# EAGLE board seeed_panel (EAGLE 9.0.1)
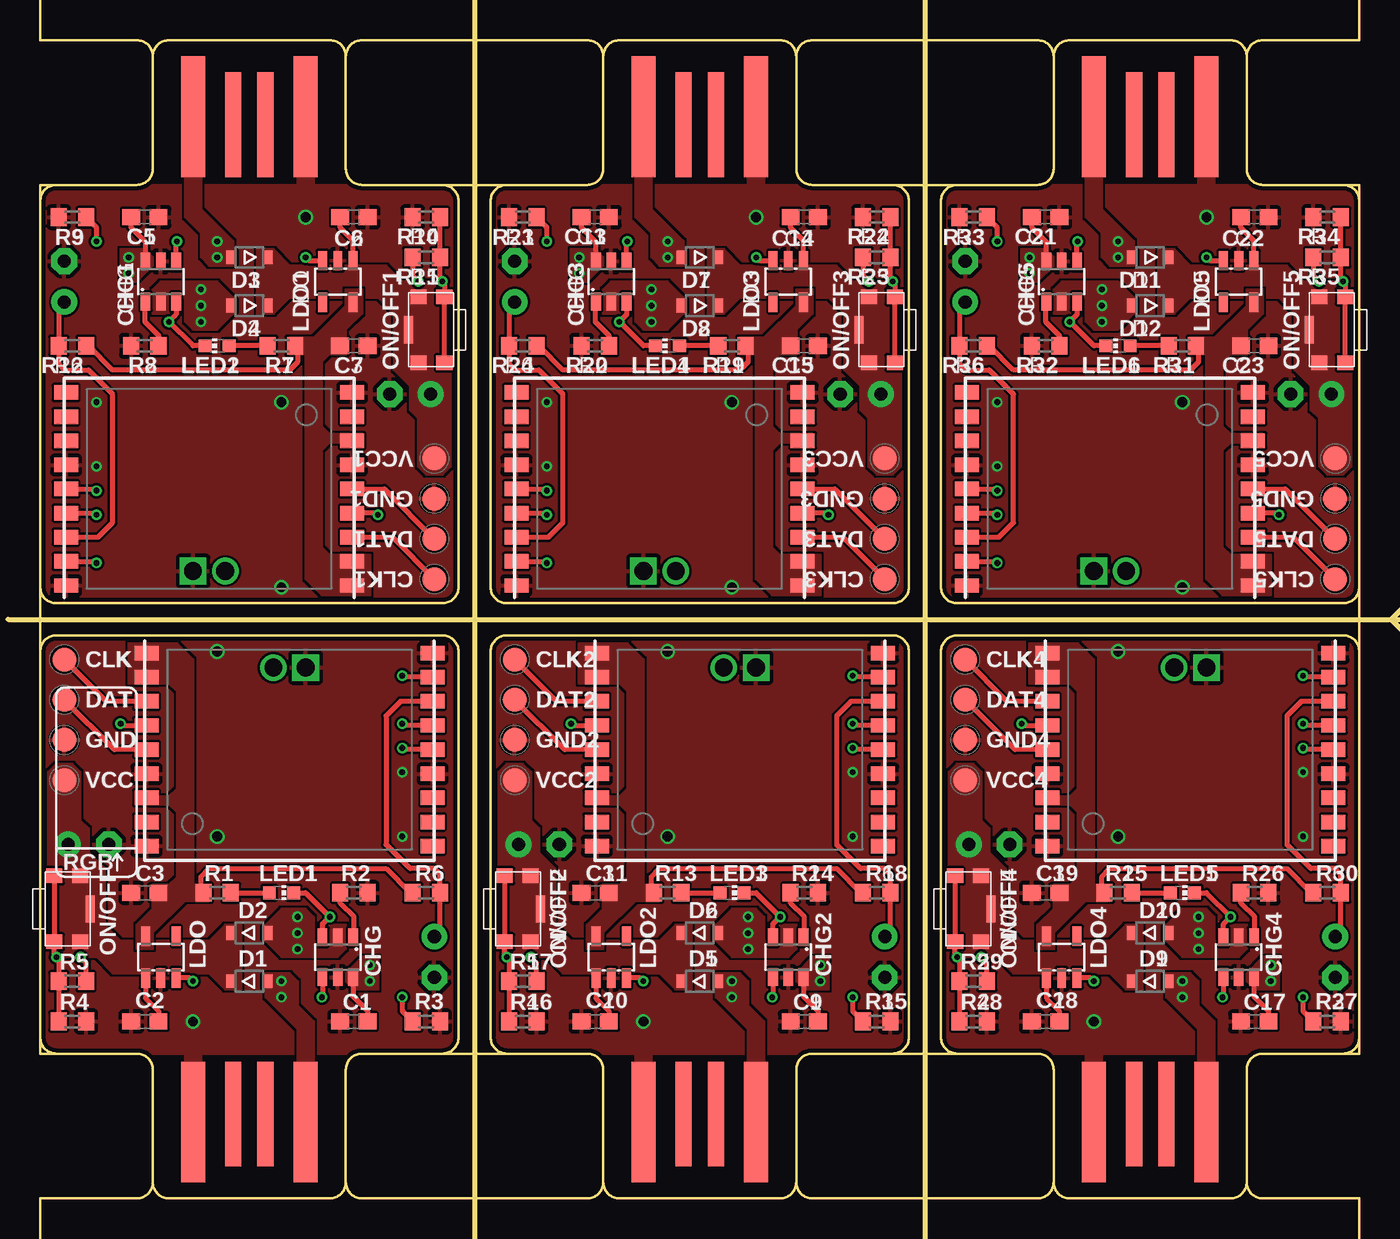
[diagram p0: board, top side]
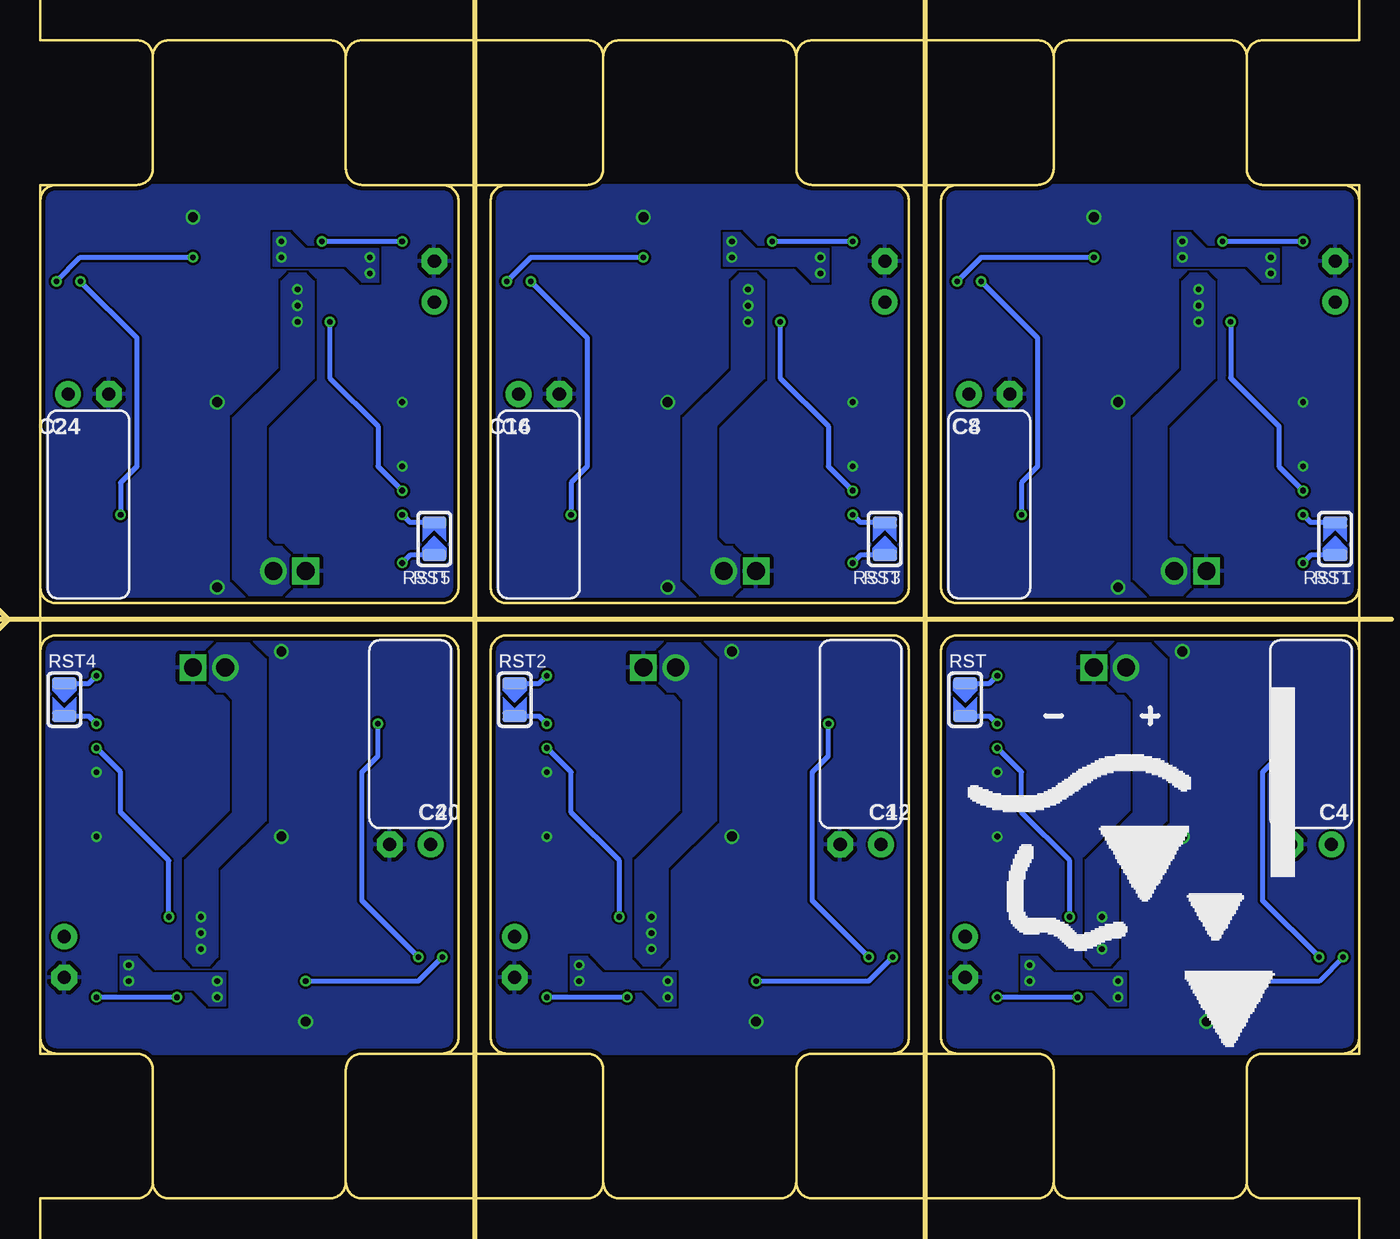
[diagram p1: board, bottom side, seen from below]

Size 82 x 72 mm. Coordinates in mm from the lower left corner, seen from the top.
Outline: 7,8 7,1 arc90 8,0 18,0 arc90 19,1 19,8 arc-90 20,9 25,9 arc90 26,10 26,34 arc90 25,35 1,35 arc90 0,34 0,10 arc90 1,9 6,9 arc-90 7,8
Outline: 19,64 19,71 arc90 18,72 8,72 arc90 7,71 7,64 arc-90 6,63 1,63 arc90 0,62 0,38 arc90 1,37 25,37 arc90 26,38 26,62 arc90 25,63 20,63 arc-90 19,64
Outline: 35,8 35,1 arc90 36,0 46,0 arc90 47,1 47,8 arc-90 48,9 53,9 arc90 54,10 54,34 arc90 53,35 29,35 arc90 28,34 28,10 arc90 29,9 34,9 arc-90 35,8
Outline: 47,64 47,71 arc90 46,72 36,72 arc90 35,71 35,64 arc-90 34,63 29,63 arc90 28,62 28,38 arc90 29,37 53,37 arc90 54,38 54,62 arc90 53,63 48,63 arc-90 47,64
Outline: 63,8 63,1 arc90 64,0 74,0 arc90 75,1 75,8 arc-90 76,9 81,9 arc90 82,10 82,34 arc90 81,35 57,35 arc90 56,34 56,10 arc90 57,9 62,9 arc-90 63,8
Outline: 75,64 75,71 arc90 74,72 64,72 arc90 63,71 63,64 arc-90 62,63 57,63 arc90 56,62 56,38 arc90 57,37 81,37 arc90 82,38 82,62 arc90 81,63 76,63 arc-90 75,64
Copper layers (1*16): Top 0.035mm / dielectric 1.5mm / Bottom 0.035mm
Design rules "SeeedStudio_2layer_DRU_no_angle_20140221": minimum track width 6mil, minimum drill 12mil, track to track 6mil, track to pad 6mil, pad to pad 6mil, via to via 6mil, smd to smd 0mil, copper to edge 10mil, drill to drill 10mil, minimum pad ring 10mil, minimum via ring 6mil, stop-mask expansion 2mil, vias tented up to drill 100mil, thermal gap 10mil
Milling: 75 lines

## Footprints (pad centres in the part's own frame; a part is rotated, then mirrored left to right if it is on the bottom)
C0603 = smd 1.1 x 1: 1 -0.85,0; 2 0.85,0
TT2D5L = drill 0.813 pad 1.6: + 1.27,0 | drill 0.813 pad 1.6 octagon: - -1.27,0
SOT23-6 = smd 0.6 x 1.1: 1 -0.95,-1.25; 2 0,-1.25; 3 0.95,-1.25; 4 0.95,1.25; 5 0,1.25; 6 -0.95,1.25
TP1.5MM = smd 1.5 x 1.5: 1 0,0
SOD323 = smd 0.65 x 0.85: 1 -1.125,0; 2 1.125,0
SOT23-5 = smd 0.55 x 1.2: 1 -0.95,-1.3; 2 0,-1.3; 3 0.95,-1.3; 4 0.95,1.3; 5 -0.95,1.3
CHIP-LED0603 = smd 0.8 x 0.8: A 0,-0.75; C 0,0.75
BATT_CON = drill 1.1 pad 1.6: V+ 0,0 | drill 1.1 pad 1.6 square: V- 2,0
KMS231GLFS = smd 0.9 x 1: 1 -2.05,0.575; 2 -2.05,2.175; 4 2.05,2.175; 5 2.05,0.575 | smd 1.7 x 0.55: 3 0,2.8
R0603 = smd 1 x 1.1: 1 -0.85,0; 2 0.85,0
SOLDERJUMPER_ARROW_NOPASTE = smd 0.762 x 1.524: 1 -1.016,0; 2 1.016,0
2PIN_STD = drill 0.813 pad 1.6: + 1.27,0 | drill 0.813 pad 1.6 octagon: - -1.27,0
USB_PADS = smd 1 x 6.5: D+ 1,3.25; D- -1,3.25 | smd 1.5 x 7.5: GND 3.5,3.75; V_SUPPLY -3.5,3.75
FRONT-FACE = smd 1.485 x 0.9: 1 -8.893,4.9; 2 -8.893,3.4; 3 -8.893,1.9; 4 -8.893,0.4; 5 -8.893,-1.1; 6 -8.893,-2.6; 7 -8.893,-4.1; 8 -8.893,-5.6; 9 -8.893,-7.1; 10 8.893,-7.1; 11 8.893,-5.6; 12 8.893,-4.1; 13 8.893,-2.6; 14 8.893,-1.1; 15 8.893,0.4; 16 8.893,1.9; 17 8.893,3.4; 18 8.893,4.9

## Placement (x,y rotation side)
C1  0.1u  [C0603]  19.5,11 180 top
C2  0.1u  [C0603]  6.5,11 180 top
C3  [C0603]  6.5,19 180 top
C4  CAP_5MM_L  [TT2D5L]  3,22 0 bottom
C5  0.1u  [C0603]  6.5,61 0 top
C6  0.1u  [C0603]  19.5,61 0 top
C7  [C0603]  19.5,53 0 top
C8  CAP_5MM_L  [TT2D5L]  23,50 180 bottom
C9  0.1u  [C0603]  47.5,11 180 top
C10  0.1u  [C0603]  34.5,11 180 top
C11  [C0603]  34.5,19 180 top
C12  CAP_5MM_L  [TT2D5L]  31,22 0 bottom
C13  0.1u  [C0603]  34.5,61 0 top
C14  0.1u  [C0603]  47.5,61 0 top
C15  [C0603]  47.5,53 0 top
C16  CAP_5MM_L  [TT2D5L]  51,50 180 bottom
C17  0.1u  [C0603]  75.5,11 180 top
C18  0.1u  [C0603]  62.5,11 180 top
C19  [C0603]  62.5,19 180 top
C20  CAP_5MM_L  [TT2D5L]  59,22 0 bottom
C21  0.1u  [C0603]  62.5,61 0 top
C22  0.1u  [C0603]  75.5,61 0 top
C23  [C0603]  75.5,53 0 top
C24  CAP_5MM_L  [TT2D5L]  79,50 180 bottom
CHG  BQ21040  [SOT23-6]  18.5,15 180 top
CHG1  BQ21040  [SOT23-6]  7.5,57 0 top
CHG2  BQ21040  [SOT23-6]  46.5,15 180 top
CHG3  BQ21040  [SOT23-6]  35.5,57 0 top
CHG4  BQ21040  [SOT23-6]  74.5,15 180 top
CHG5  BQ21040  [SOT23-6]  63.5,57 0 top
CLK  TESTPAD_PROG  [TP1.5MM]  1.5,33.5 270 top
CLK1  TESTPAD_PROG  [TP1.5MM]  24.5,38.5 90 top
CLK2  TESTPAD_PROG  [TP1.5MM]  29.5,33.5 270 top
CLK3  TESTPAD_PROG  [TP1.5MM]  52.5,38.5 90 top
CLK4  TESTPAD_PROG  [TP1.5MM]  57.5,33.5 270 top
CLK5  TESTPAD_PROG  [TP1.5MM]  80.5,38.5 90 top
D1  NSR0320MW2T1G  [SOD323]  13,13.5 0 top
D2  NSR0320MW2T1G  [SOD323]  13,16.5 0 top
D3  NSR0320MW2T1G  [SOD323]  13,58.5 180 top
D4  NSR0320MW2T1G  [SOD323]  13,55.5 180 top
D5  NSR0320MW2T1G  [SOD323]  41,13.5 0 top
D6  NSR0320MW2T1G  [SOD323]  41,16.5 0 top
D7  NSR0320MW2T1G  [SOD323]  41,58.5 180 top
D8  NSR0320MW2T1G  [SOD323]  41,55.5 180 top
D9  NSR0320MW2T1G  [SOD323]  69,13.5 0 top
D10  NSR0320MW2T1G  [SOD323]  69,16.5 0 top
D11  NSR0320MW2T1G  [SOD323]  69,58.5 180 top
D12  NSR0320MW2T1G  [SOD323]  69,55.5 180 top
DAT  TESTPAD_PROG  [TP1.5MM]  1.5,31 270 top
DAT1  TESTPAD_PROG  [TP1.5MM]  24.5,41 90 top
DAT2  TESTPAD_PROG  [TP1.5MM]  29.5,31 270 top
DAT3  TESTPAD_PROG  [TP1.5MM]  52.5,41 90 top
DAT4  TESTPAD_PROG  [TP1.5MM]  57.5,31 270 top
DAT5  TESTPAD_PROG  [TP1.5MM]  80.5,41 90 top
GND  TESTPAD_PROG  [TP1.5MM]  1.5,28.5 270 top
GND1  TESTPAD_PROG  [TP1.5MM]  24.5,43.5 90 top
GND2  TESTPAD_PROG  [TP1.5MM]  29.5,28.5 270 top
GND3  TESTPAD_PROG  [TP1.5MM]  52.5,43.5 90 top
GND4  TESTPAD_PROG  [TP1.5MM]  57.5,28.5 270 top
GND5  TESTPAD_PROG  [TP1.5MM]  80.5,43.5 90 top
LDO  TLV755P  [SOT23-5]  7.5,15 0 top
LDO1  TLV755P  [SOT23-5]  18.5,57 180 top
LDO2  TLV755P  [SOT23-5]  35.5,15 0 top
LDO3  TLV755P  [SOT23-5]  46.5,57 180 top
LDO4  TLV755P  [SOT23-5]  63.5,15 0 top
LDO5  TLV755P  [SOT23-5]  74.5,57 180 top
LED1  [CHIP-LED0603]  15,19 270 top
LED2  [CHIP-LED0603]  11,53 90 top
LED3  [CHIP-LED0603]  43,19 270 top
LED4  [CHIP-LED0603]  39,53 90 top
LED5  [CHIP-LED0603]  71,19 270 top
LED6  [CHIP-LED0603]  67,53 90 top
LP1  150mAh  [BATT_CON]  11.5,39 180 top
LP2  150mAh  [BATT_CON]  42.5,33 0 top
LP3  150mAh  [BATT_CON]  39.5,39 180 top
LP4  150mAh  [BATT_CON]  70.5,33 0 top
LP5  150mAh  [BATT_CON]  67.5,39 180 top
LP402025  150mAh  [BATT_CON]  14.5,33 0 top
ON/OFF  KMS231GPLFSNO_PEGS  [KMS231GLFS]  0.3,18 270 top
ON/OFF1  KMS231GPLFSNO_PEGS  [KMS231GLFS]  25.7,54 90 top
ON/OFF2  KMS231GPLFSNO_PEGS  [KMS231GLFS]  28.3,18 270 top
ON/OFF3  KMS231GPLFSNO_PEGS  [KMS231GLFS]  53.7,54 90 top
ON/OFF4  KMS231GPLFSNO_PEGS  [KMS231GLFS]  56.3,18 270 top
ON/OFF5  KMS231GPLFSNO_PEGS  [KMS231GLFS]  81.7,54 90 top
R1  220  [R0603]  11,19 0 top
R2  10K  [R0603]  19.5,19 0 top
R3  6.8K  [R0603]  24,11 0 top
R4  100K  [R0603]  2,11 180 top
R5  10K  [R0603]  2,13.5 180 top
R6  10K  [R0603]  24,19 180 top
R7  220  [R0603]  15,53 180 top
R8  10K  [R0603]  6.5,53 180 top
R9  6.8K  [R0603]  2,61 180 top
R10  100K  [R0603]  24,61 0 top
R11  10K  [R0603]  24,58.5 0 top
R12  10K  [R0603]  2,53 0 top
R13  220  [R0603]  39,19 0 top
R14  10K  [R0603]  47.5,19 0 top
R15  6.8K  [R0603]  52,11 0 top
R16  100K  [R0603]  30,11 180 top
R17  10K  [R0603]  30,13.5 180 top
R18  10K  [R0603]  52,19 180 top
R19  220  [R0603]  43,53 180 top
R20  10K  [R0603]  34.5,53 180 top
R21  6.8K  [R0603]  30,61 180 top
R22  100K  [R0603]  52,61 0 top
R23  10K  [R0603]  52,58.5 0 top
R24  10K  [R0603]  30,53 0 top
R25  220  [R0603]  67,19 0 top
R26  10K  [R0603]  75.5,19 0 top
R27  6.8K  [R0603]  80,11 0 top
R28  100K  [R0603]  58,11 180 top
R29  10K  [R0603]  58,13.5 180 top
R30  10K  [R0603]  80,19 180 top
R31  220  [R0603]  71,53 180 top
R32  10K  [R0603]  62.5,53 180 top
R33  6.8K  [R0603]  58,61 180 top
R34  100K  [R0603]  80,61 0 top
R35  10K  [R0603]  80,58.5 0 top
R36  10K  [R0603]  58,53 0 top
RST  [SOLDERJUMPER_ARROW_NOPASTE]  24.5,31 270 bottom
RST1  [SOLDERJUMPER_ARROW_NOPASTE]  1.5,41 90 bottom
RST2  [SOLDERJUMPER_ARROW_NOPASTE]  52.5,31 270 bottom
RST3  [SOLDERJUMPER_ARROW_NOPASTE]  29.5,41 90 bottom
RST4  [SOLDERJUMPER_ARROW_NOPASTE]  80.5,31 270 bottom
RST5  [SOLDERJUMPER_ARROW_NOPASTE]  57.5,41 90 bottom
U$1  2PIN_STD  [2PIN_STD]  24.5,15 90 top
U$2  USB_PCB  [USB_PADS]  13,8.5 180 top
U$3  USB_PCB  [USB_PADS]  13,63.5 0 top
U$4  2PIN_STD  [2PIN_STD]  1.5,57 270 top
U$5  USB_PCB  [USB_PADS]  41,8.5 180 top
U$6  2PIN_STD  [2PIN_STD]  52.5,15 90 top
U$7  USB_PCB  [USB_PADS]  41,63.5 0 top
U$8  2PIN_STD  [2PIN_STD]  29.5,57 270 top
U$9  USB_PCB  [USB_PADS]  69,8.5 180 top
U$10  2PIN_STD  [2PIN_STD]  80.5,15 90 top
U$11  USB_PCB  [USB_PADS]  69,63.5 0 top
U$12  2PIN_STD  [2PIN_STD]  57.5,57 270 top
VCC  TESTPAD_PROG  [TP1.5MM]  1.5,26 270 top
VCC1  TESTPAD_PROG  [TP1.5MM]  24.5,46 90 top
VCC2  TESTPAD_PROG  [TP1.5MM]  29.5,26 270 top
VCC3  TESTPAD_PROG  [TP1.5MM]  52.5,46 90 top
VCC4  TESTPAD_PROG  [TP1.5MM]  57.5,26 270 top
VCC5  TESTPAD_PROG  [TP1.5MM]  80.5,46 90 top
WROOM-01  ESP-WROOM-02FRONT-FACE  [FRONT-FACE]  10.5,43 180 top
WROOM-02  ESP-WROOM-02FRONT-FACE  [FRONT-FACE]  15.5,29 0 top
WROOM-03  ESP-WROOM-02FRONT-FACE  [FRONT-FACE]  43.5,29 0 top
WROOM-04  ESP-WROOM-02FRONT-FACE  [FRONT-FACE]  38.5,43 180 top
WROOM-05  ESP-WROOM-02FRONT-FACE  [FRONT-FACE]  71.5,29 0 top
WROOM-06  ESP-WROOM-02FRONT-FACE  [FRONT-FACE]  66.5,43 180 top

## Library data of the parts
C1-C3 C5-C7 C9-C11 C13-C15 C17-C19 C21-C23 = monoblink_wifi; SPICEPREFIX: C
C4 C8 C12 C16 C20 C24 CHG CHG1-CHG5 CLK CLK1-CLK5 D1-D12 DAT DAT1-DAT5 GND GND1-GND5 LDO LDO1-LDO5 LP1-LP5 LP402025 ON/OFF ON/OFF1-ON/OFF5 U$1-U$12 VCC VCC1-VCC5 WROOM-01-WROOM-06 = monoblink_wifi
LED1-LED6 = adafruit
R1-R36 = monoblink_wifi; SPICEPREFIX: R
RST RST1-RST5 = monoblink_wifi; BOM: EXCLUDE

## Nets
/CHG-/LED: CHG.3 LED1.C WROOM-02.14
/CHG-/LED1: CHG1.3 LED2.C WROOM-01.14
/CHG-/LED2: CHG2.3 LED3.C WROOM-03.14
/CHG-/LED3: CHG3.3 LED4.C WROOM-04.14
/CHG-/LED4: CHG4.3 LED5.C WROOM-05.14
/CHG-/LED5: CHG5.3 LED6.C WROOM-06.14
/SD: R5.1 WROOM-02.4
/SD1: R11.1 WROOM-01.4
/SD2: R17.1 WROOM-03.4
/SD3: R23.1 WROOM-04.4
/SD4: R29.1 WROOM-05.4
/SD5: R35.1 WROOM-06.4
A0: R6.1 U$1.+ WROOM-02.16
A1: R12.1 U$4.+ WROOM-01.16
A2: R18.1 U$6.+ WROOM-03.16
A3: R24.1 U$8.+ WROOM-04.16
A4: R30.1 U$10.+ WROOM-05.16
A5: R36.1 U$12.+ WROOM-06.16
GND: C1.2 C2.2 C3.2 C4.- CHG.5 GND.1 LDO.2 LP402025.V- R2.2 R3.2 R4.1 U$1.- U$2.GND WROOM-02.6 WROOM-02.9 WROOM-02.13 WROOM-02.18
GND1: C5.2 C6.2 C7.2 C8.- CHG1.5 GND1.1 LDO1.2 LP1.V- R8.2 R9.2 R10.1 U$3.GND U$4.- WROOM-01.6 WROOM-01.9 WROOM-01.13 WROOM-01.18
GND2: C9.2 C10.2 C11.2 C12.- CHG2.5 GND2.1 LDO2.2 LP2.V- R14.2 R15.2 R16.1 U$5.GND U$6.- WROOM-03.6 WROOM-03.9 WROOM-03.13 WROOM-03.18
GND3: C13.2 C14.2 C15.2 C16.- CHG3.5 GND3.1 LDO3.2 LP3.V- R20.2 R21.2 R22.1 U$7.GND U$8.- WROOM-04.6 WROOM-04.9 WROOM-04.13 WROOM-04.18
GND4: C17.2 C18.2 C19.2 C20.- CHG4.5 GND4.1 LDO4.2 LP4.V- R26.2 R27.2 R28.1 U$9.GND U$10.- WROOM-05.6 WROOM-05.9 WROOM-05.13 WROOM-05.18
GND5: C21.2 C22.2 C23.2 C24.- CHG5.5 GND5.1 LDO5.2 LP5.V- R32.2 R33.2 R34.1 U$11.GND U$12.- WROOM-06.6 WROOM-06.9 WROOM-06.13 WROOM-06.18
IO0: WROOM-02.8
IO1: WROOM-01.10
IO2: WROOM-01.8
IO3: RST1.1 WROOM-01.17
IO4: WROOM-02.10
IO5: WROOM-03.10
IO6: WROOM-03.8
IO7: RST2.1 WROOM-03.17
IO8: WROOM-04.10
IO9: WROOM-04.8
IO10: RST3.1 WROOM-04.17
IO11: WROOM-05.10
IO12: WROOM-05.8
IO13: RST4.1 WROOM-05.17
IO14: WROOM-06.10
IO15: WROOM-06.8
IO16: RST.1 WROOM-02.17
IO17: RST5.1 WROOM-06.17
ISET: CHG.4 R3.1
ISET1: CHG1.4 R9.1
ISET2: CHG2.4 R15.1
ISET3: CHG3.4 R21.1
ISET4: CHG4.4 R27.1
ISET5: CHG5.4 R33.1
LDO_EN: LDO.3 ON/OFF.1 ON/OFF.5 R4.2 R5.2
LDO_EN1: LDO1.3 ON/OFF1.1 ON/OFF1.5 R10.2 R11.2
LDO_EN2: LDO2.3 ON/OFF2.1 ON/OFF2.5 R16.2 R17.2
LDO_EN3: LDO3.3 ON/OFF3.1 ON/OFF3.5 R22.2 R23.2
LDO_EN4: LDO4.3 ON/OFF4.1 ON/OFF4.5 R28.2 R29.2
LDO_EN5: LDO5.3 ON/OFF5.1 ON/OFF5.5 R34.2 R35.2
LED_CLK: CLK.1 WROOM-02.3
LED_CLK1: CLK1.1 WROOM-01.3
LED_CLK2: CLK2.1 WROOM-03.3
LED_CLK3: CLK3.1 WROOM-04.3
LED_CLK4: CLK4.1 WROOM-05.3
LED_CLK5: CLK5.1 WROOM-06.3
LED_DATA: DAT.1 WROOM-02.5
LED_DATA1: DAT1.1 WROOM-01.5
LED_DATA2: DAT2.1 WROOM-03.5
LED_DATA3: DAT3.1 WROOM-04.5
LED_DATA4: DAT4.1 WROOM-05.5
LED_DATA5: DAT5.1 WROOM-06.5
N$1: LED1.A R1.2
N$2: LED2.A R7.2
N$3: LED3.A R13.2
N$4: LED4.A R19.2
N$5: LED5.A R25.2
N$6: LED6.A R31.2
RST: RST.2 WROOM-02.15
RST1: RST1.2 WROOM-01.15
RST2: RST2.2 WROOM-03.15
RST3: RST3.2 WROOM-04.15
RST4: RST4.2 WROOM-05.15
RST5: RST5.2 WROOM-06.15
RX: WROOM-02.11
RX1: WROOM-01.11
RX2: WROOM-03.11
RX3: WROOM-04.11
RX4: WROOM-05.11
RX5: WROOM-06.11
TS: CHG.1 R2.1
TS1: CHG1.1 R8.1
TS2: CHG2.1 R14.1
TS3: CHG3.1 R20.1
TS4: CHG4.1 R26.1
TS5: CHG5.1 R32.1
TX: WROOM-02.12
TX1: WROOM-01.12
TX2: WROOM-03.12
TX3: WROOM-04.12
TX4: WROOM-05.12
TX5: WROOM-06.12
VBAT: CHG.2 D2.2 LP402025.V+
VBAT1: CHG1.2 D4.2 LP1.V+
VBAT2: CHG2.2 D6.2 LP2.V+
VBAT3: CHG3.2 D8.2 LP3.V+
VBAT4: CHG4.2 D10.2 LP4.V+
VBAT5: CHG5.2 D12.2 LP5.V+
VCC: C2.1 C4.+ D1.1 D2.1 LDO.1 ON/OFF.2 ON/OFF.3 ON/OFF.4 VCC.1
VCC1: C6.1 C8.+ D3.1 D4.1 LDO1.1 ON/OFF1.2 ON/OFF1.3 ON/OFF1.4 VCC1.1
VCC2: C10.1 C12.+ D5.1 D6.1 LDO2.1 ON/OFF2.2 ON/OFF2.3 ON/OFF2.4 VCC2.1
VCC3: C14.1 C16.+ D7.1 D8.1 LDO3.1 ON/OFF3.2 ON/OFF3.3 ON/OFF3.4 VCC3.1
VCC4: C18.1 C20.+ D9.1 D10.1 LDO4.1 ON/OFF4.2 ON/OFF4.3 ON/OFF4.4 VCC4.1
VCC5: C22.1 C24.+ D11.1 D12.1 LDO5.1 ON/OFF5.2 ON/OFF5.3 ON/OFF5.4 VCC5.1
VDD: C3.1 LDO.5 R1.1 R6.2 WROOM-02.1 WROOM-02.2 WROOM-02.7
VDD1: C7.1 LDO1.5 R7.1 R12.2 WROOM-01.1 WROOM-01.2 WROOM-01.7
VDD2: C11.1 LDO2.5 R13.1 R18.2 WROOM-03.1 WROOM-03.2 WROOM-03.7
VDD3: C15.1 LDO3.5 R19.1 R24.2 WROOM-04.1 WROOM-04.2 WROOM-04.7
VDD4: C19.1 LDO4.5 R25.1 R30.2 WROOM-05.1 WROOM-05.2 WROOM-05.7
VDD5: C23.1 LDO5.5 R31.1 R36.2 WROOM-06.1 WROOM-06.2 WROOM-06.7
VUSB_5V: C1.1 CHG.6 D1.2 U$2.V_SUPPLY
VUSB_5V1: C5.1 CHG1.6 D3.2 U$3.V_SUPPLY
VUSB_5V2: C9.1 CHG2.6 D5.2 U$5.V_SUPPLY
VUSB_5V3: C13.1 CHG3.6 D7.2 U$7.V_SUPPLY
VUSB_5V4: C17.1 CHG4.6 D9.2 U$9.V_SUPPLY
VUSB_5V5: C21.1 CHG5.6 D11.2 U$11.V_SUPPLY

## Tracks (layer width: path | path; a pad name or v marks a point on that pad's centre or on a via)
/CHG-/LED  (via drill 0.35)
  Top 0.305: CHG.3 17.55,17.05 v18,17.5 16.5,19 LED1.C | WROOM-02.14 22.6,27.9 v22.5,28
  Bottom 0.305: v18,17.5 18,21 21,24 21,26.5 v22.5,28
/CHG-/LED1  (via drill 0.35)
  Top 0.305: CHG1.3 8.45,54.95 v8,54.5 9.5,53 LED2.C | WROOM-01.14 3.4,44.1 v3.5,44
  Bottom 0.305: v8,54.5 8,51 5,48 5,45.5 v3.5,44
/CHG-/LED2  (via drill 0.35)
  Top 0.305: CHG2.3 45.55,17.05 v46,17.5 44.5,19 LED3.C | WROOM-03.14 50.6,27.9 v50.5,28
  Bottom 0.305: v46,17.5 46,21 49,24 49,26.5 v50.5,28
/CHG-/LED3  (via drill 0.35)
  Top 0.305: CHG3.3 36.45,54.95 v36,54.5 37.5,53 LED4.C | WROOM-04.14 31.4,44.1 v31.5,44
  Bottom 0.305: v36,54.5 36,51 33,48 33,45.5 v31.5,44
/CHG-/LED4  (via drill 0.35)
  Top 0.305: CHG4.3 73.55,17.05 v74,17.5 72.5,19 LED5.C | WROOM-05.14 78.6,27.9 v78.5,28
  Bottom 0.305: v74,17.5 74,21 77,24 77,26.5 v78.5,28
/CHG-/LED5  (via drill 0.35)
  Top 0.305: CHG5.3 64.45,54.95 v64,54.5 65.5,53 LED6.C | WROOM-06.14 59.4,44.1 v59.5,44
  Bottom 0.305: v64,54.5 64,51 61,48 61,45.5 v59.5,44
/SD  (via drill 0.35)
  Top 0.305: R5.1 2.85,14.65 v2.5,15 | v5,29.5 5.1,29.4 WROOM-02.4
  Bottom 0.305: v2.5,15 6,18.5 6,26.5 5,27.5 v5,29.5
/SD1  (via drill 0.35)
  Top 0.305: R11.1 23.15,57.35 v23.5,57 | v21,42.5 20.9,42.6 WROOM-01.4
  Bottom 0.305: v23.5,57 20,53.5 20,45.5 21,44.5 v21,42.5
/SD2  (via drill 0.35)
  Top 0.305: R17.1 30.85,14.65 v30.5,15 | v33,29.5 33.1,29.4 WROOM-03.4
  Bottom 0.305: v30.5,15 34,18.5 34,26.5 33,27.5 v33,29.5
/SD3  (via drill 0.35)
  Top 0.305: R23.1 51.15,57.35 v51.5,57 | v49,42.5 48.9,42.6 WROOM-04.4
  Bottom 0.305: v51.5,57 48,53.5 48,45.5 49,44.5 v49,42.5
/SD4  (via drill 0.35)
  Top 0.305: R29.1 58.85,14.65 v58.5,15 | v61,29.5 61.1,29.4 WROOM-05.4
  Bottom 0.305: v58.5,15 62,18.5 62,26.5 61,27.5 v61,29.5
/SD5  (via drill 0.35)
  Top 0.305: R35.1 79.15,57.35 v79.5,57 | v77,42.5 76.9,42.6 WROOM-06.4
  Bottom 0.305: v79.5,57 76,53.5 76,45.5 77,44.5 v77,42.5
A0
  Top 0.305: U$1.+ 24.85,16.62 R6.1 24.85,20.15 24.5,20.5 23,20.5 21.5,22 21.5,30 22.4,30.9 WROOM-02.16
A1
  Top 0.305: U$4.+ 1.15,55.38 R12.1 1.15,51.85 1.5,51.5 3,51.5 4.5,50 4.5,42 3.6,41.1 WROOM-01.16
A2
  Top 0.305: U$6.+ 52.85,16.62 R18.1 52.85,20.15 52.5,20.5 51,20.5 49.5,22 49.5,30 50.4,30.9 WROOM-03.16
A3
  Top 0.305: U$8.+ 29.15,55.38 R24.1 29.15,51.85 29.5,51.5 31,51.5 32.5,50 32.5,42 31.6,41.1 WROOM-04.16
A4
  Top 0.305: U$10.+ 80.85,16.62 R30.1 80.85,20.15 80.5,20.5 79,20.5 77.5,22 77.5,30 78.4,30.9 WROOM-05.16
A5
  Top 0.305: U$12.+ 57.15,55.38 R36.1 57.15,51.85 57.5,51.5 59,51.5 60.5,50 60.5,42 59.6,41.1 WROOM-06.16
GND  (via drill 0.35, 0.6 pad 0.8)
  other vias: 22.5,26.5 22.5,22.5 9.5,11 11,22.5 11,34
  pour Top (rank 3): -0.5,35.5 26.5,35.5 26.5,9 -0.5,9
  pour Bottom (rank 2): -0.5,35.5 26.5,35.5 26.5,9 -0.5,9
  pour Top (no thermals): 9,8 10,8 10,9.5 9,9.5
GND1  (via drill 0.35, 0.6 pad 0.8)
  other vias: 3.5,45.5 3.5,49.5 16.5,61 15,49.5 15,38
  pour Top (rank 3): 26.5,36.5 -0.5,36.5 -0.5,63 26.5,63
  pour Bottom (rank 2): 26.5,36.5 -0.5,36.5 -0.5,63 26.5,63
  pour Top (no thermals): 17,64 16,64 16,62.5 17,62.5
GND2  (via drill 0.35, 0.6 pad 0.8)
  other vias: 50.5,26.5 50.5,22.5 37.5,11 39,22.5 39,34
  pour Top (rank 3): 27.5,35.5 54.5,35.5 54.5,9 27.5,9
  pour Bottom (rank 2): 27.5,35.5 54.5,35.5 54.5,9 27.5,9
  pour Top (no thermals): 37,8 38,8 38,9.5 37,9.5
GND3  (via drill 0.35, 0.6 pad 0.8)
  other vias: 31.5,45.5 31.5,49.5 44.5,61 43,49.5 43,38
  pour Top (rank 3): 54.5,36.5 27.5,36.5 27.5,63 54.5,63
  pour Bottom (rank 2): 54.5,36.5 27.5,36.5 27.5,63 54.5,63
  pour Top (no thermals): 45,64 44,64 44,62.5 45,62.5
GND4  (via drill 0.35, 0.6 pad 0.8)
  other vias: 78.5,26.5 78.5,22.5 65.5,11 67,22.5 67,34
  pour Top (rank 3): 55.5,35.5 82.5,35.5 82.5,9 55.5,9
  pour Bottom (rank 2): 55.5,35.5 82.5,35.5 82.5,9 55.5,9
  pour Top (no thermals): 65,8 66,8 66,9.5 65,9.5
GND5  (via drill 0.35, 0.6 pad 0.8)
  other vias: 59.5,45.5 59.5,49.5 72.5,61 71,49.5 71,38
  pour Top (rank 3): 82.5,36.5 55.5,36.5 55.5,63 82.5,63
  pour Bottom (rank 2): 82.5,36.5 55.5,36.5 55.5,63 82.5,63
  pour Top (no thermals): 73,64 72,64 72,62.5 73,62.5
IO3  (via drill 0.35)
  Top 0.305: WROOM-01.17 3.4,39.6 v3.5,39.5
  Bottom 0.305: RST1.1 3.02,39.98 v3.5,39.5
IO7  (via drill 0.35)
  Top 0.305: WROOM-03.17 50.6,32.4 v50.5,32.5
  Bottom 0.305: RST2.1 50.98,32.02 v50.5,32.5
IO10  (via drill 0.35)
  Top 0.305: WROOM-04.17 31.4,39.6 v31.5,39.5
  Bottom 0.305: RST3.1 31.02,39.98 v31.5,39.5
IO13  (via drill 0.35)
  Top 0.305: WROOM-05.17 78.6,32.4 v78.5,32.5
  Bottom 0.305: RST4.1 78.98,32.02 v78.5,32.5
IO16  (via drill 0.35)
  Top 0.305: WROOM-02.17 22.6,32.4 v22.5,32.5
  Bottom 0.305: RST.1 22.98,32.02 v22.5,32.5
IO17  (via drill 0.35)
  Top 0.305: WROOM-06.17 59.4,39.6 v59.5,39.5
  Bottom 0.305: RST5.1 59.02,39.98 v59.5,39.5
ISET  (via drill 0.35)
  Top 0.305: v22.5,12.5 22.5,11.65 R3.1 | CHG.4 17.55,12.55 v17.5,12.5
  Bottom 0.305: v17.5,12.5 v22.5,12.5
ISET1  (via drill 0.35)
  Top 0.305: v3.5,59.5 3.5,60.35 R9.1 | CHG1.4 8.45,59.45 v8.5,59.5
  Bottom 0.305: v8.5,59.5 v3.5,59.5
ISET2  (via drill 0.35)
  Top 0.305: v50.5,12.5 50.5,11.65 R15.1 | CHG2.4 45.55,12.55 v45.5,12.5
  Bottom 0.305: v45.5,12.5 v50.5,12.5
ISET3  (via drill 0.35)
  Top 0.305: v31.5,59.5 31.5,60.35 R21.1 | CHG3.4 36.45,59.45 v36.5,59.5
  Bottom 0.305: v36.5,59.5 v31.5,59.5
ISET4  (via drill 0.35)
  Top 0.305: v78.5,12.5 78.5,11.65 R27.1 | CHG4.4 73.55,12.55 v73.5,12.5
  Bottom 0.305: v73.5,12.5 v78.5,12.5
ISET5  (via drill 0.35)
  Top 0.305: v59.5,59.5 59.5,60.35 R33.1 | CHG5.4 64.45,59.45 v64.5,59.5
  Bottom 0.305: v64.5,59.5 v59.5,59.5
LDO_EN  (via drill 0.35)
  Top 0.305: ON/OFF.1 ON/OFF.5 0.88,15.12 v1,15 1.15,14.85 R5.2 R4.2 | v9.5,13.5 9.3,13.7 LDO.3
  Bottom 0.305: v1,15 2.5,13.5 v9.5,13.5
LDO_EN1  (via drill 0.35)
  Top 0.305: ON/OFF1.1 ON/OFF1.5 25.12,56.88 v25,57 24.85,57.15 R11.2 R10.2 | v16.5,58.5 16.7,58.3 LDO1.3
  Bottom 0.305: v25,57 23.5,58.5 v16.5,58.5
LDO_EN2  (via drill 0.35)
  Top 0.305: ON/OFF2.1 ON/OFF2.5 28.88,15.12 v29,15 29.15,14.85 R17.2 R16.2 | v37.5,13.5 37.3,13.7 LDO2.3
  Bottom 0.305: v29,15 30.5,13.5 v37.5,13.5
LDO_EN3  (via drill 0.35)
  Top 0.305: ON/OFF3.1 ON/OFF3.5 53.12,56.88 v53,57 52.85,57.15 R23.2 R22.2 | v44.5,58.5 44.7,58.3 LDO3.3
  Bottom 0.305: v53,57 51.5,58.5 v44.5,58.5
LDO_EN4  (via drill 0.35)
  Top 0.305: ON/OFF4.1 ON/OFF4.5 56.88,15.12 v57,15 57.15,14.85 R29.2 R28.2 | v65.5,13.5 65.3,13.7 LDO4.3
  Bottom 0.305: v57,15 58.5,13.5 v65.5,13.5
LDO_EN5  (via drill 0.35)
  Top 0.305: ON/OFF5.1 ON/OFF5.5 81.12,56.88 v81,57 80.85,57.15 R35.2 R34.2 | v72.5,58.5 72.7,58.3 LDO5.3
  Bottom 0.305: v81,57 79.5,58.5 v72.5,58.5
LED_CLK
  Top 0.305: WROOM-02.3 4.1,30.9 CLK.1
LED_CLK1
  Top 0.305: WROOM-01.3 21.9,41.1 CLK1.1
LED_CLK2
  Top 0.305: WROOM-03.3 32.1,30.9 CLK2.1
LED_CLK3
  Top 0.305: WROOM-04.3 49.9,41.1 CLK3.1
LED_CLK4
  Top 0.305: WROOM-05.3 60.1,30.9 CLK4.1
LED_CLK5
  Top 0.305: WROOM-06.3 77.9,41.1 CLK5.1
LED_DATA
  Top 0.305: WROOM-02.5 4.6,27.9 DAT.1
LED_DATA1
  Top 0.305: WROOM-01.5 21.4,44.1 DAT1.1
LED_DATA2
  Top 0.305: WROOM-03.5 32.6,27.9 DAT2.1
LED_DATA3
  Top 0.305: WROOM-04.5 49.4,44.1 DAT3.1
LED_DATA4
  Top 0.305: WROOM-05.5 60.6,27.9 DAT4.1
LED_DATA5
  Top 0.305: WROOM-06.5 77.4,44.1 DAT5.1
N$1
  Top 0.305: R1.2 LED1.A
N$2
  Top 0.305: R7.2 LED2.A
N$3
  Top 0.305: R13.2 LED3.A
N$4
  Top 0.305: R19.2 LED4.A
N$5
  Top 0.305: R25.2 LED5.A
N$6
  Top 0.305: R31.2 LED6.A
RST  (via drill 0.35)
  Top 0.305: WROOM-02.15 22.6,29.4 v22.5,29.5
  Bottom 0.305: RST.2 22.98,29.98 v22.5,29.5
RST1  (via drill 0.35)
  Top 0.305: WROOM-01.15 3.4,42.6 v3.5,42.5
  Bottom 0.305: RST1.2 3.02,42.02 v3.5,42.5
RST2  (via drill 0.35)
  Top 0.305: WROOM-03.15 50.6,29.4 v50.5,29.5
  Bottom 0.305: RST2.2 50.98,29.98 v50.5,29.5
RST3  (via drill 0.35)
  Top 0.305: WROOM-04.15 31.4,42.6 v31.5,42.5
  Bottom 0.305: RST3.2 31.02,42.02 v31.5,42.5
RST4  (via drill 0.35)
  Top 0.305: WROOM-05.15 78.6,29.4 v78.5,29.5
  Bottom 0.305: RST4.2 78.98,29.98 v78.5,29.5
RST5  (via drill 0.35)
  Top 0.305: WROOM-06.15 59.4,42.6 v59.5,42.5
  Bottom 0.305: RST5.2 59.02,42.02 v59.5,42.5
TS
  Top 0.305: CHG.1 19.5,16.3 19.5,17.5 18.65,18.35 R2.1
TS1
  Top 0.305: CHG1.1 6.5,55.7 6.5,54.5 7.35,53.65 R8.1
TS2
  Top 0.305: CHG2.1 47.5,16.3 47.5,17.5 46.65,18.35 R14.1
TS3
  Top 0.305: CHG3.1 34.5,55.7 34.5,54.5 35.35,53.65 R20.1
TS4
  Top 0.305: CHG4.1 75.5,16.3 75.5,17.5 74.65,18.35 R26.1
TS5
  Top 0.305: CHG5.1 62.5,55.7 62.5,54.5 63.35,53.65 R32.1
VBAT  (via drill 0.35)
  other vias: 16,17.5 16,16.5 16,15.5
  pour Top (no thermals): 14,17 14,16 15,15 18.5,15 19,15.5 19,17 18,17 18,16 17,16 17,17.5 16.5,18 15,18
  pour Bottom (no thermals): 17,15 16.5,14.5 15.5,14.5 15,15 15,20.5 12,23.5 12,33.5 13,34.5 15,34.5 15.5,34 15.5,32 15,31.5 14.5,31.5 14,31 14,24 17,21
VBAT1  (via drill 0.35)
  other vias: 10,54.5 10,55.5 10,56.5
  pour Top (no thermals): 12,55 12,56 11,57 7.5,57 7,56.5 7,55 8,55 8,56 9,56 9,54.5 9.5,54 11,54
  pour Bottom (no thermals): 9,57 9.5,57.5 10.5,57.5 11,57 11,51.5 14,48.5 14,38.5 13,37.5 11,37.5 10.5,38 10.5,40 11,40.5 11.5,40.5 12,41 12,48 9,51
VBAT2  (via drill 0.35)
  other vias: 44,17.5 44,16.5 44,15.5
  pour Top (no thermals): 42,17 42,16 43,15 46.5,15 47,15.5 47,17 46,17 46,16 45,16 45,17.5 44.5,18 43,18
  pour Bottom (no thermals): 45,15 44.5,14.5 43.5,14.5 43,15 43,20.5 40,23.5 40,33.5 41,34.5 43,34.5 43.5,34 43.5,32 43,31.5 42.5,31.5 42,31 42,24 45,21
VBAT3  (via drill 0.35)
  other vias: 38,54.5 38,55.5 38,56.5
  pour Top (no thermals): 40,55 40,56 39,57 35.5,57 35,56.5 35,55 36,55 36,56 37,56 37,54.5 37.5,54 39,54
  pour Bottom (no thermals): 37,57 37.5,57.5 38.5,57.5 39,57 39,51.5 42,48.5 42,38.5 41,37.5 39,37.5 38.5,38 38.5,40 39,40.5 39.5,40.5 40,41 40,48 37,51
VBAT4  (via drill 0.35)
  other vias: 72,17.5 72,16.5 72,15.5
  pour Top (no thermals): 70,17 70,16 71,15 74.5,15 75,15.5 75,17 74,17 74,16 73,16 73,17.5 72.5,18 71,18
  pour Bottom (no thermals): 73,15 72.5,14.5 71.5,14.5 71,15 71,20.5 68,23.5 68,33.5 69,34.5 71,34.5 71.5,34 71.5,32 71,31.5 70.5,31.5 70,31 70,24 73,21
VBAT5  (via drill 0.35)
  other vias: 66,54.5 66,55.5 66,56.5
  pour Top (no thermals): 68,55 68,56 67,57 63.5,57 63,56.5 63,55 64,55 64,56 65,56 65,54.5 65.5,54 67,54
  pour Bottom (no thermals): 65,57 65.5,57.5 66.5,57.5 67,57 67,51.5 70,48.5 70,38.5 69,37.5 67,37.5 66.5,38 66.5,40 67,40.5 67.5,40.5 68,41 68,48 65,51
VCC
  Top 0.305: 1.73,25.77 VCC.1 | LDO.1 6.55,12.45 7.35,11.65 C2.1
  pour Top (rank 2, no thermals): 12.5,17 12.5,13 11.5,13 10.5,14 4.5,14 3.5,15 0.5,15 0.5,26.5 1,27 2,27 2.5,26.5 2.5,23.5 3,23 3,21.5 4,20.5 4,17 5,16 10.5,16 11.5,17
VCC1
  Top 0.305: 24.27,46.23 VCC1.1 | LDO1.1 19.45,59.55 18.65,60.35 C6.1
  pour Top (rank 2, no thermals): 13.5,55 13.5,59 14.5,59 15.5,58 21.5,58 22.5,57 25.5,57 25.5,45.5 25,45 24,45 23.5,45.5 23.5,48.5 23,49 23,50.5 22,51.5 22,55 21,56 15.5,56 14.5,55
VCC2
  Top 0.305: 29.73,25.77 VCC2.1 | LDO2.1 34.55,12.45 35.35,11.65 C10.1
  pour Top (rank 2, no thermals): 40.5,17 40.5,13 39.5,13 38.5,14 32.5,14 31.5,15 28.5,15 28.5,26.5 29,27 30,27 30.5,26.5 30.5,23.5 31,23 31,21.5 32,20.5 32,17 33,16 38.5,16 39.5,17
VCC3
  Top 0.305: 52.27,46.23 VCC3.1 | LDO3.1 47.45,59.55 46.65,60.35 C14.1
  pour Top (rank 2, no thermals): 41.5,55 41.5,59 42.5,59 43.5,58 49.5,58 50.5,57 53.5,57 53.5,45.5 53,45 52,45 51.5,45.5 51.5,48.5 51,49 51,50.5 50,51.5 50,55 49,56 43.5,56 42.5,55
VCC4
  Top 0.305: 57.73,25.77 VCC4.1 | LDO4.1 62.55,12.45 63.35,11.65 C18.1
  pour Top (rank 2, no thermals): 68.5,17 68.5,13 67.5,13 66.5,14 60.5,14 59.5,15 56.5,15 56.5,26.5 57,27 58,27 58.5,26.5 58.5,23.5 59,23 59,21.5 60,20.5 60,17 61,16 66.5,16 67.5,17
VCC5
  Top 0.305: 80.27,46.23 VCC5.1 | LDO5.1 75.45,59.55 74.65,60.35 C22.1
  pour Top (rank 2, no thermals): 69.5,55 69.5,59 70.5,59 71.5,58 77.5,58 78.5,57 81.5,57 81.5,45.5 81,45 80,45 79.5,45.5 79.5,48.5 79,49 79,50.5 78,51.5 78,55 77,56 71.5,56 70.5,55
VDD
  Top 0.305: 7.55,18.7 C3.1 | R1.1 10,19.15 10,20 10.5,20.5 | R6.2 23,19 21.5,20.5 10.5,20.5 | 10.51,20.5 10.5,20.5
  pour Top (no thermals): 7,19.5 7,18 6,17 6,15.5 7,15.5 7,16.5 9,18.5 10.5,18.5 10.5,19.5 9.5,19.5 9.5,33.5 8.5,34.5 5.5,34.5 5.5,32 8,32 8.5,31.5 8.5,25.5 8,25 6,25 6,24.5 8,24.5 8.5,24 8.5,20 8,19.5
VDD1
  Top 0.305: 18.45,53.3 C7.1 | R7.1 16,52.85 16,52 15.5,51.5 | R12.2 3,53 4.5,51.5 15.5,51.5 | 15.5,51.49 15.5,51.5
  pour Top (no thermals): 19,52.5 19,54 20,55 20,56.5 19,56.5 19,55.5 17,53.5 15.5,53.5 15.5,52.5 16.5,52.5 16.5,38.5 17.5,37.5 20.5,37.5 20.5,40 18,40 17.5,40.5 17.5,46.5 18,47 20,47 20,47.5 18,47.5 17.5,48 17.5,52 18,52.5
VDD2
  Top 0.305: 35.55,18.7 C11.1 | R13.1 38,19.15 38,20 38.5,20.5 | R18.2 51,19 49.5,20.5 38.5,20.5 | 38.51,20.5 38.5,20.5
  pour Top (no thermals): 35,19.5 35,18 34,17 34,15.5 35,15.5 35,16.5 37,18.5 38.5,18.5 38.5,19.5 37.5,19.5 37.5,33.5 36.5,34.5 33.5,34.5 33.5,32 36,32 36.5,31.5 36.5,25.5 36,25 34,25 34,24.5 36,24.5 36.5,24 36.5,20 36,19.5
VDD3
  Top 0.305: 46.45,53.3 C15.1 | R19.1 44,52.85 44,52 43.5,51.5 | R24.2 31,53 32.5,51.5 43.5,51.5 | 43.49,51.49 43.5,51.5
  pour Top (no thermals): 47,52.5 47,54 48,55 48,56.5 47,56.5 47,55.5 45,53.5 43.5,53.5 43.5,52.5 44.5,52.5 44.5,38.5 45.5,37.5 48.5,37.5 48.5,40 46,40 45.5,40.5 45.5,46.5 46,47 48,47 48,47.5 46,47.5 45.5,48 45.5,52 46,52.5
VDD4
  Top 0.305: 63.55,18.7 C19.1 | R25.1 66,19.15 66,20 66.5,20.5 | R30.2 79,19 77.5,20.5 66.5,20.5 | 66.5,20.5
  pour Top (no thermals): 63,19.5 63,18 62,17 62,15.5 63,15.5 63,16.5 65,18.5 66.5,18.5 66.5,19.5 65.5,19.5 65.5,33.5 64.5,34.5 61.5,34.5 61.5,32 64,32 64.5,31.5 64.5,25.5 64,25 62,25 62,24.5 64,24.5 64.5,24 64.5,20 64,19.5
VDD5
  Top 0.305: 74.45,53.3 C23.1 | R31.1 72,52.85 72,52 71.5,51.5 | R36.2 59,53 60.5,51.5 71.5,51.5 | 71.5,51.49 71.5,51.5
  pour Top (no thermals): 75,52.5 75,54 76,55 76,56.5 75,56.5 75,55.5 73,53.5 71.5,53.5 71.5,52.5 72.5,52.5 72.5,38.5 73.5,37.5 76.5,37.5 76.5,40 74,40 73.5,40.5 73.5,46.5 74,47 76,47 76,47.5 74,47.5 73.5,48 73.5,52 74,52.5
VUSB_5V  (via drill 0.35)
  Top 0.305: CHG.6 19.45,12.55 20.35,11.65 C1.1
  other vias: 15,13.5 15,12.5 20.5,13.5 20.5,14.5
  pour Top (no thermals): 16,8 17,8 17,11 16,12 16,13.5 15.5,14 14,14 14,12.5 16,10.5
  pour Top (no thermals): 19,13.5 19,14 20,15 21,15 21,13 19.5,13
  pour Bottom (no thermals): 14.5,14 14.5,12 15.5,12 16.5,13 21,13 21,15 20,15 19,14
VUSB_5V1  (via drill 0.35)
  Top 0.305: CHG1.6 6.55,59.45 5.65,60.35 C5.1
  other vias: 11,58.5 11,59.5 5.5,58.5 5.5,57.5
  pour Top (no thermals): 10,64 9,64 9,61 10,60 10,58.5 10.5,58 12,58 12,59.5 10,61.5
  pour Top (no thermals): 7,58.5 7,58 6,57 5,57 5,59 6.5,59
  pour Bottom (no thermals): 11.5,58 11.5,60 10.5,60 9.5,59 5,59 5,57 6,57 7,58
VUSB_5V2  (via drill 0.35)
  Top 0.305: CHG2.6 47.45,12.55 48.35,11.65 C9.1
  other vias: 43,13.5 43,12.5 48.5,13.5 48.5,14.5
  pour Top (no thermals): 44,8 45,8 45,11 44,12 44,13.5 43.5,14 42,14 42,12.5 44,10.5
  pour Top (no thermals): 47,13.5 47,14 48,15 49,15 49,13 47.5,13
  pour Bottom (no thermals): 42.5,14 42.5,12 43.5,12 44.5,13 49,13 49,15 48,15 47,14
VUSB_5V3  (via drill 0.35)
  Top 0.305: CHG3.6 34.55,59.45 33.65,60.35 C13.1
  other vias: 39,58.5 39,59.5 33.5,58.5 33.5,57.5
  pour Top (no thermals): 38,64 37,64 37,61 38,60 38,58.5 38.5,58 40,58 40,59.5 38,61.5
  pour Top (no thermals): 35,58.5 35,58 34,57 33,57 33,59 34.5,59
  pour Bottom (no thermals): 39.5,58 39.5,60 38.5,60 37.5,59 33,59 33,57 34,57 35,58
VUSB_5V4  (via drill 0.35)
  Top 0.305: CHG4.6 75.45,12.55 76.35,11.65 C17.1
  other vias: 71,13.5 71,12.5 76.5,13.5 76.5,14.5
  pour Top (no thermals): 72,8 73,8 73,11 72,12 72,13.5 71.5,14 70,14 70,12.5 72,10.5
  pour Top (no thermals): 75,13.5 75,14 76,15 77,15 77,13 75.5,13
  pour Bottom (no thermals): 70.5,14 70.5,12 71.5,12 72.5,13 77,13 77,15 76,15 75,14
VUSB_5V5  (via drill 0.35)
  Top 0.305: CHG5.6 62.55,59.45 61.65,60.35 C21.1
  other vias: 67,58.5 67,59.5 61.5,58.5 61.5,57.5
  pour Top (no thermals): 66,64 65,64 65,61 66,60 66,58.5 66.5,58 68,58 68,59.5 66,61.5
  pour Top (no thermals): 63,58.5 63,58 62,57 61,57 61,59 62.5,59
  pour Bottom (no thermals): 67.5,58 67.5,60 66.5,60 65.5,59 61,59 61,57 62,57 63,58

## Text on the board
tNames: RGB
Milling: V-CUT | V-CUT | V-CUT
_tNames: R3 | C1 | C2 | R4 | R3 | C1 | C2 | R4 | R3 | C1 | C2 | R4 | CHG | D1 | LDO | R5 | CHG | D1 | LDO | R5 | CHG | D1 | LDO | R5 | D2 | D2 | D2 | R6 | R2 | LED1 | R1 | C3 | R6 | R2 | LED1 | R1 | C3 | R6 | R2 | LED1 | R1 | C3 | ON/OFF | ON/OFF | ON/OFF | VCC | VCC | VCC | GND | GND | GND | DAT | DAT | DAT | CLK | CLK | CLK | CLK | CLK | CLK | DAT | DAT | DAT | GND | GND | GND | VCC | VCC | VCC | ON/OFF | ON/OFF | ON/OFF | C3 | R1 | LED1 | R2 | R6 | C3 | R1 | LED1 | R2 | R6 | C3 | R1 | LED1 | R2 | R6 | D2 | D2 | D2 | R5 | LDO | D1 | CHG | R5 | LDO | D1 | CHG | R5 | LDO | D1 | CHG | R4 | C2 | C1 | R3 | R4 | C2 | C1 | R3 | R4 | C2 | C1 | R3
_bNames: C4 | C4 | C4 | RST | RST | RST | RST | RST | RST | C4 | C4 | C4